# Altium PCB tiny200.PcbDoc
Units mil, origin at the board's own origin, x right, y up, seen from the top; angles counter-clockwise.
Board outline 2000 x 900 mil, 4 copper layers (Top Layer, GND, MidLayer1, Bottom Layer), stack 28.8 mil thick; 116 components, 103 nets, 483 pads, 188 vias.
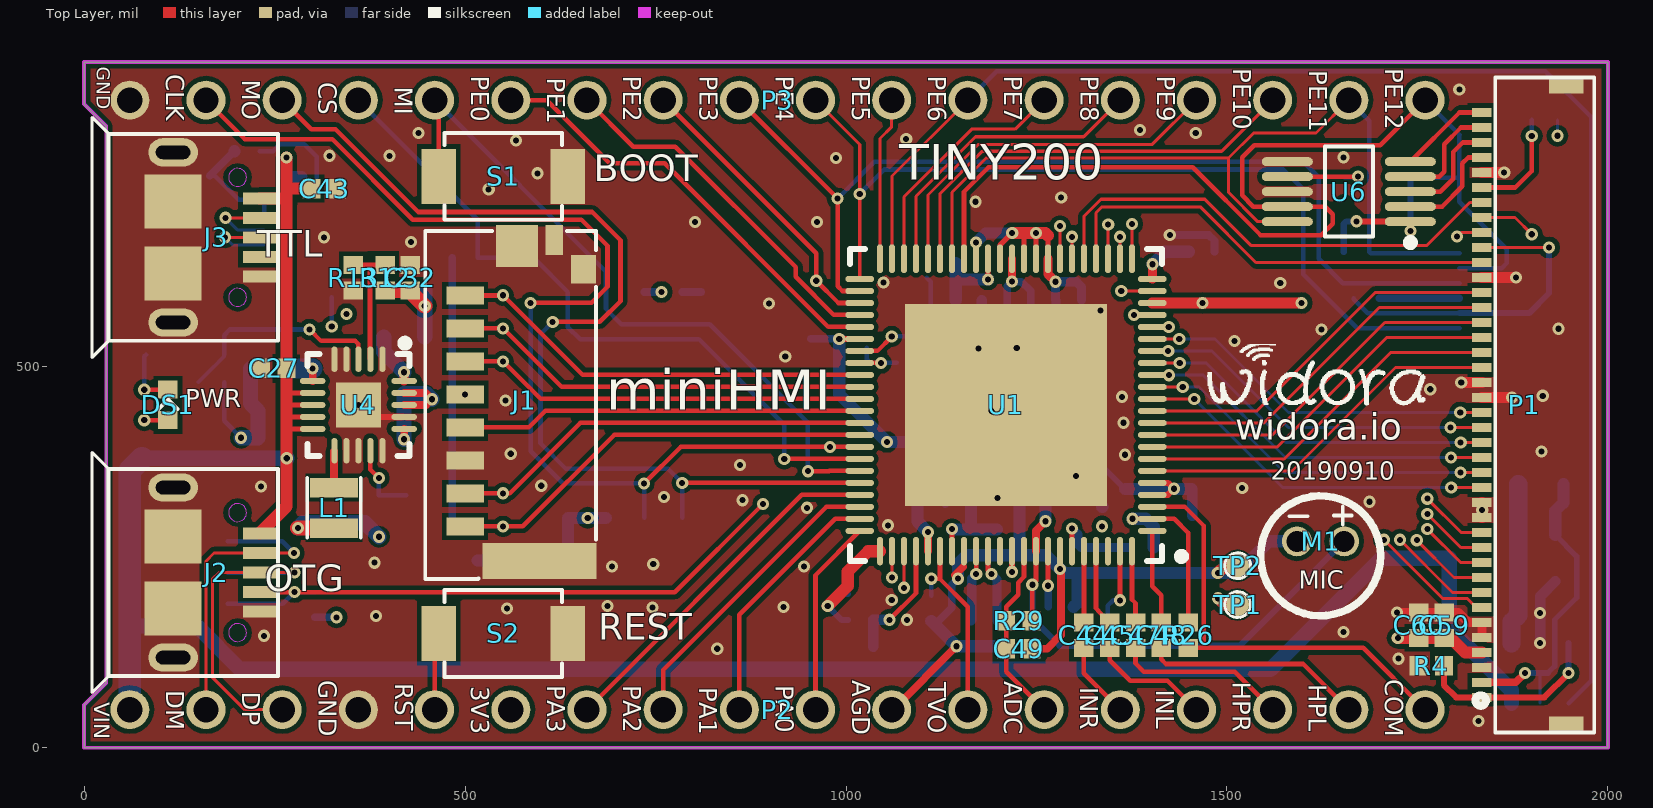
[diagram p0: Top Layer view]
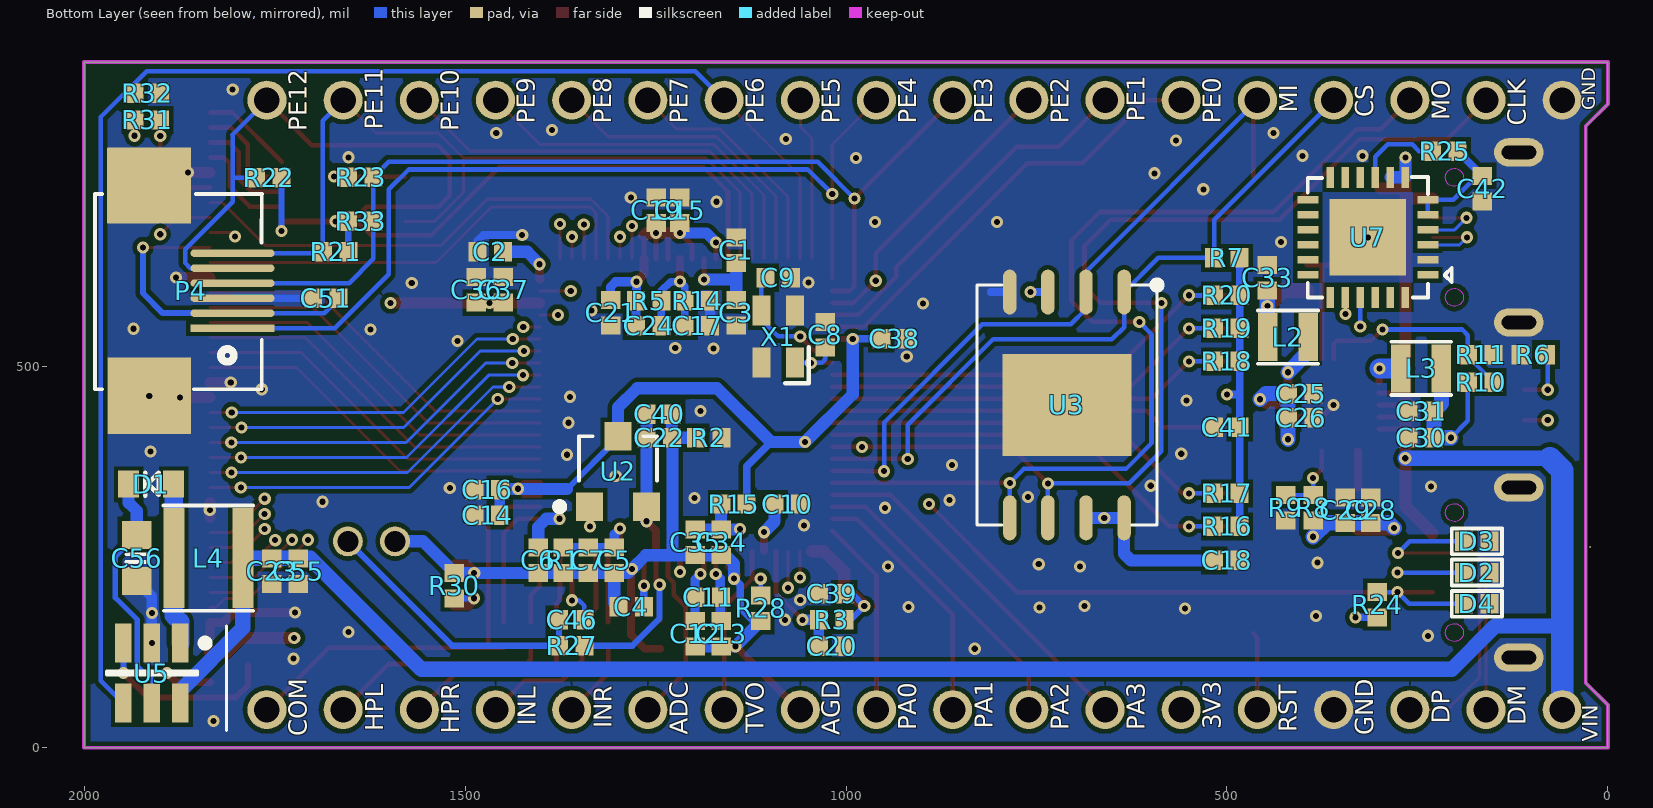
[diagram p1: Bottom Layer view, seen from below]
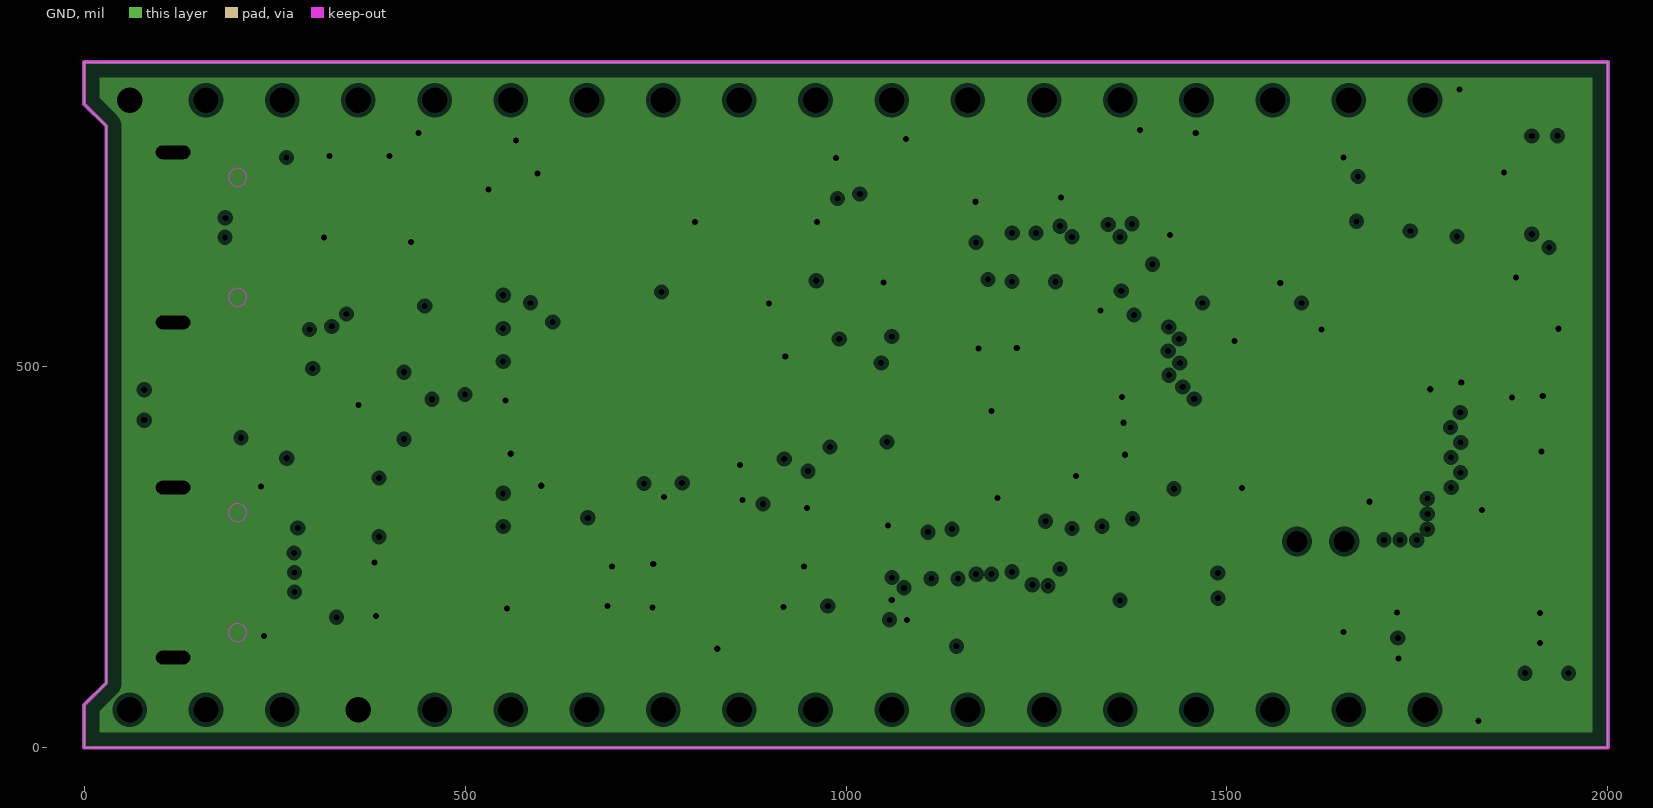
[diagram p2: GND, clearances drawn from the general rule]
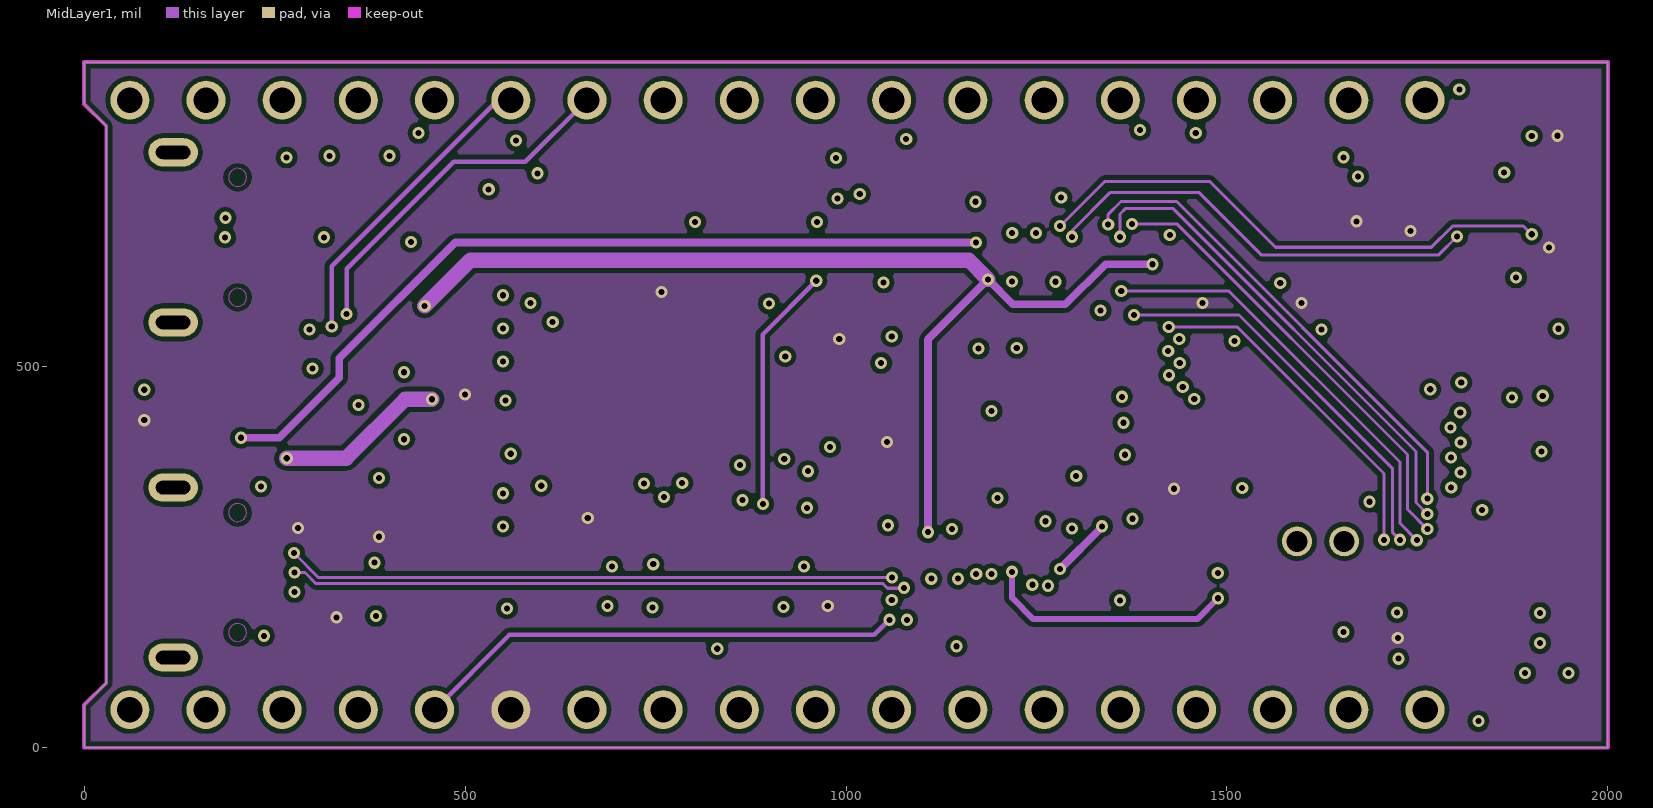
[diagram p3: MidLayer1]
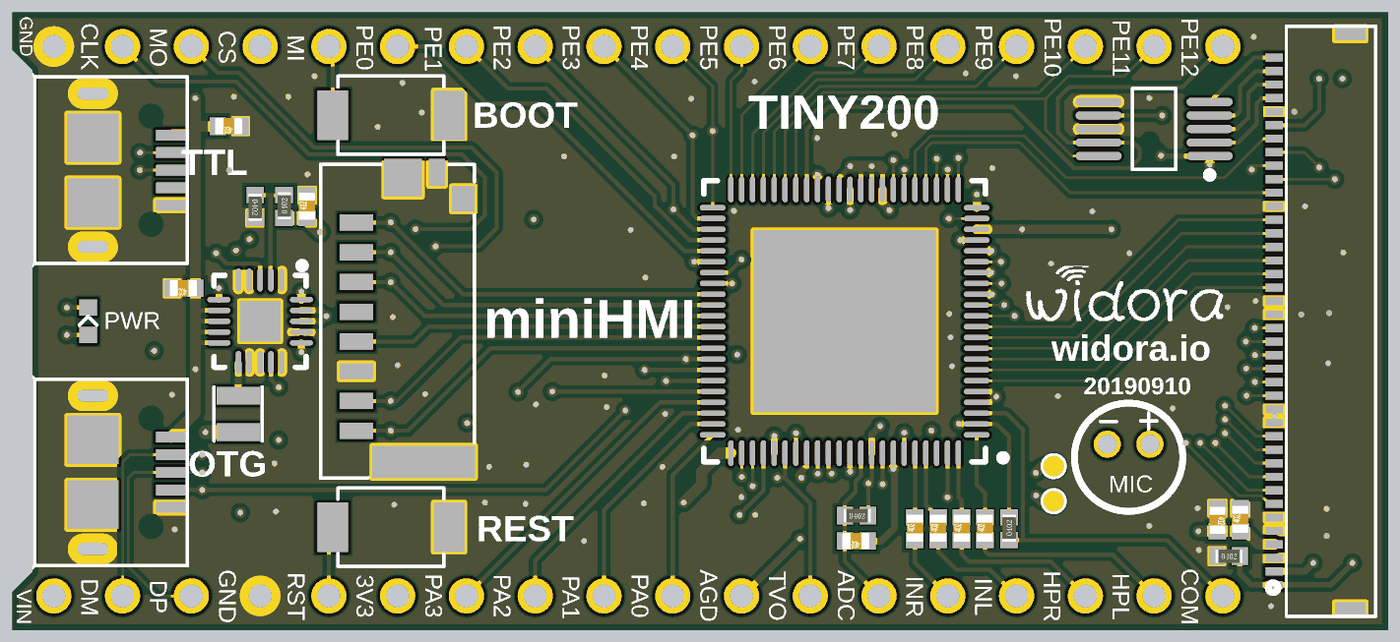
[diagram p4: 3D render of the assembled board from above, using the file's embedded part models]
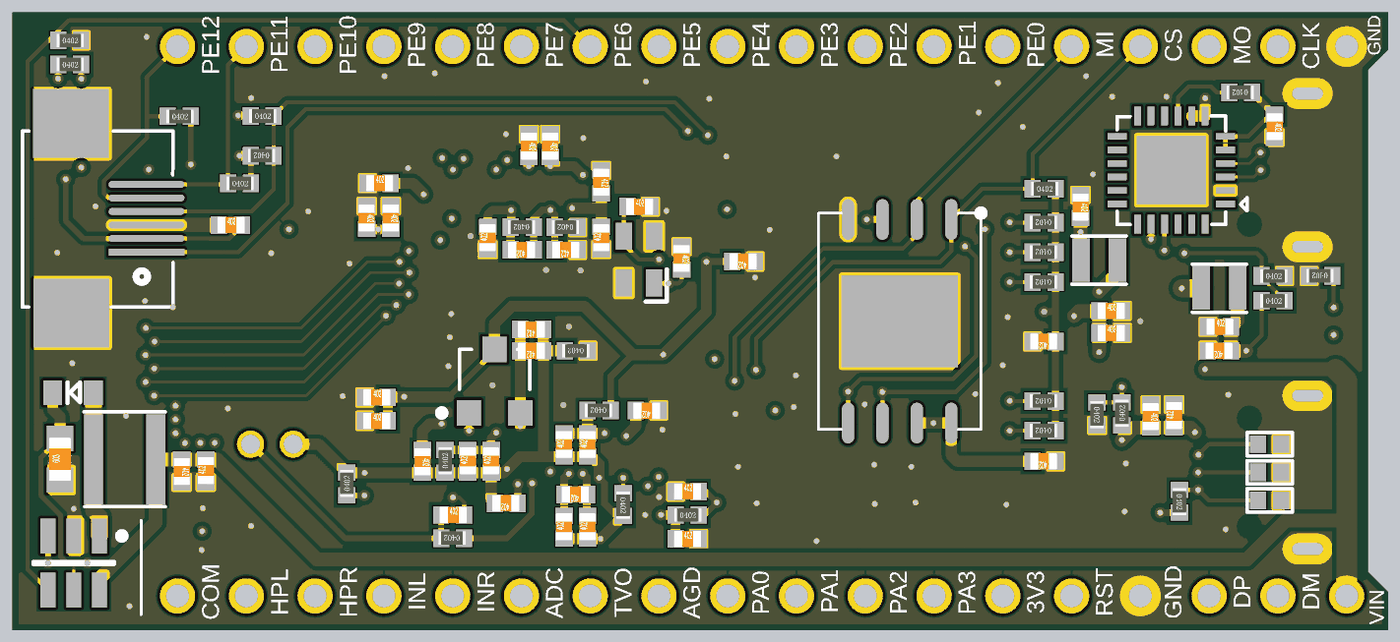
[diagram p5: 3D render of the assembled board from below, using the file's embedded part models]

## Layer stack, top to bottom
Top Solder: solder mask 0.4, Solder Resist, Dk 3.5
Top Layer: signal copper 1.4
Dielectric1: core 7.6, FR-4, Dk 4.8
GND: plane copper 1.4, net GND
Dielectric3: prepreg 8, FR-4, Dk 4.8
MidLayer1: signal copper 1.4
Dielectric2: core 7.6, FR-4, Dk 4.8
Bottom Layer: signal copper 1.4
Bottom Solder: solder mask 0.4, Solder Resist, Dk 3.5

## Board outline
29,816 0,845 0,900 2000,900 2000,0 0,0 0,56 29,85

## Design rules (kind name [scope] priority, off if disabled: settings)
Clearance Clearance_Polygon [InPolygon] p1: gap=6
Clearance [All] p2: gap=4
ComponentClearance [All] p1 off: gap=1 collisioncheckmode=3 verticalgap=1 showdistances=FALSE
DiffPairsRouting [All] p1: maxlimit=20 minlimit=4 mostfreqgap=5 toplayer_minwidth=4 toplayer_maxwidth=4 toplayer_prefwidth=4 midlayer1_minwidth=4 midlayer1_maxwidth=4 midlayer1_prefwidth=4 bottomlayer_minwidth=4 bottomlayer_maxwidth=4 bottomlayer_prefwidth=4 maxuncoupledlength=3000
FabricationTestPointUsage TestPointUsage [All] p1 off: valid=0 allowmultiple=FALSE
FabricationTestpoint Testpoint [(IsPad And (OnTopLayer Or OnBottomLayer))] p1 off: side=3 testpointundercomponent=TRUE minsize=40 maxsize=100 preferedsize=60 minholesize=0 maxholesize=40 preferedholesize=32 testpointgrid=1 allowsidetop=TRUE allowsidebottom=TRUE usegrid=TRUE gridtolerance=0.01
Height [All] p1 off: minheight=0 maxheight=1000 prefheight=500
HoleSize [All] p1: absolutevalues=TRUE maxlimit=150 minlimit=1 maxpercent=80.000 minpercent=20.000
MinimumSolderMaskSliver [All] p1 off: minsoldermaskwidth=1
PlaneClearance [All] p1: clearance=6
PlaneConnect [All] p1: planeconnectstyle=Direct reliefexpansion=20 reliefentries=4 reliefconductorwidth=25 reliefairgap=10
PolygonConnect PolygonConnect_isvia [All vs IsVia] p1: connectstyle=Direct reliefconductorwidth=10 reliefentries=4 polygonreliefangle="90 Angle" airgapwidth=10
PolygonConnect [All] p2: connectstyle=Direct reliefconductorwidth=8 reliefentries=4 polygonreliefangle="90 Angle" airgapwidth=10
RoutingVias [All] p1: holewidth=8 width=16 viastyle="Through Hole" minholewidth=8 minwidth=16 maxholewidth=100 maxwidth=100
ShortCircuit [InNet('WIFI') vs InNet('GND')] p1 off: allowed=FALSE
SilkToSilkClearance [All] p1: silktosilkclearance=0
SilkToSolderMaskClearance SilkscreenOverComponentPads [IsPad] p1: minsilkscreentomaskgap=0 clearancetoexposedcopper=TRUE
SolderMaskExpansion [All] p1: expansion=4
Width [All] p1: maxlimit=100 minlimit=4 preferedwidth=5
18 further rules are at their usual default settings.

## Classes and differential pairs
differential pair U: +U_P -U_N

## Components (designator, comment, footprint, x,y, rotation, side; value= is the part's Value field where it differs from the comment)
C1 "10uF" C0402 1144,653 r270 bottom
C2 "0.1uF" C0402 1467,651 r180 bottom
C3 "0.1uF" C0402 1144,571 r90 bottom
C4 "1uF" C0402 1282,185 r0 bottom
C5 "4.7uF" C0402 1304.11,246 r90 bottom
C6 "1uF" C0402 1404,246 r270 bottom
C7 "0.1uF" C0402 1338,246 r90 bottom
C8 "10pF" C0402 1027,542 r270 bottom
C9 "10pF" C0402 1089,617 r180 bottom
C10 "0.1uF" C0402 1077,320 r0 bottom
C11 "10uF" C0402 1181.11,197.7 r0 bottom
C12 "4.7uF" C0402 1198,150 r90 bottom
C13 "4.7uF" C0402 1164,150 r90 bottom
C14 "10uF" C0402 1471,305 r180 bottom
C15 "1uF" C0402 1218.11,705.7 r270 bottom
C16 "0.1uF" C0402 1471,339 r180 bottom
C17 "0.1uF" C0402 1195,554 r0 bottom
C18 "0.1uF" C0402 500,246 r0 bottom
C19 "10uF" C0402 1249.11,705.7 r270 bottom
C20 "1uF" C0402 1019,133 r180 bottom
C21 "0.1uF" C0402 1309,571 r90 bottom
C22 "4.7uF" C0402 1245,407 r0 bottom
C23 "10uF" C0402 1754,232 r270 bottom
C24 "0.1uF" C0402 1259,554 r0 bottom
C25 "10uF" C0402 403,465 r180 bottom
C26 "10uF" C0402 403,433 r180 bottom
C27 "10uF" C0402 249,498 r180 top
C28 "10uF" C0402 311,312 r90 bottom
C29 "0.1uF" C0402 345,312 r270 bottom
C30 "10uF" C0402 245,407 r0 bottom
C31 "0.1uF" C0402 245,442 r180 bottom
C32 "10uF" C0402 428,617 r90 top
C33 "0.1uF" C0402 447,617 r270 bottom
C34 "10uF" C0402 1164,270 r90 bottom
C35 "0.1uF" C0402 1198,270 r90 bottom
C36 "10uF" C0402 1485,601 r270 bottom
C37 "0.1uF" C0402 1450,601 r270 bottom
C38 "0.1uF" C0402 937,537 r0 bottom
C39 "0.1uF" C0402 1019,202 r180 bottom
C40 "0.1uF" C0402 1245,438 r0 bottom
C41 "104" C0402 499.96,420.48 r0 bottom
C42 "10uF" C0402 165,734 r270 bottom
C43 "10uF" C0402 315,734 r180 top
C44 "1uF" C0402 1312,148 r90 top
C45 "1uF" C0402 1346,148 r90 top
C46 "1uF" C0402 1360,168 r180 bottom
C47 "10uF" C0402 1380,148 r90 top
C48 "10uF" C0402 1414,148 r90 top
C49 "1nF" C0402 1227,130 r180 top
C51 "104" C0402 1683,590 r180 bottom
C55 "10uF" C0402 1719,232 r90 bottom
C56 "10uF/25V" C0603 1931,249 r90 bottom
C59 "104" C0402 1785.27,161 r90 top
C60 "10uF" C0402 1752,161 r270 top
D1 "B5819WT" SOD523 1912,346 r0 bottom
D2 "Diode_tvs" 0402TVS 172,230 r180 bottom
D3 "Diode_tvs" 0402TVS 172,271 r0 bottom
D4 "Diode_tvs" 0402TVS 172,189 r0 bottom
DS1 "GREEN" LED0402 110,450 r90 top
J1 "TF" TFCARD473092651 560,450 r270 top locked
J2 "MICRO_USB" MICROUSB 160,230 r270 top locked
J3 "MICRO_USB" MICROUSB 160,670 r270 top locked
L1 "2.2uH" VLS2016 328,315 r90 top
L2 "2.2uH" VLS2016 420,539 r180 bottom
L3 "2.2uH" VLS2016 245,498 r0 bottom
L4 "2.2uH" VLS3012E 1837,248.5 r180 bottom
M1 "MIC" MIC 1622.91,252 r0 top
P1 "FFC40-RGBLCD" FFC/SM0.5-1H40 1890,450 r90 top locked
P2 "Header 18" HDR1X18-M2 60,50 r0 top locked
P3 "Header 18" HDR1X18-M2 60,850 r0 top locked
P4 "FPC6" FPC6 1860,600 r90 bottom locked
R1 "200K" R0402 1371,246 r90 bottom
R2 "0R" R0402 1180,407 r0 bottom
R3 "10K" R0402 1019,168 r180 bottom
R4 "4R3" R0402 1768,108 r0 top
R5 "2K/1%" R0402 1259,587 r0 bottom
R6 "5.1K" R0402 98,516 r0 bottom
R7 "10K" R0402 499.96,643 r180 bottom
R8 "680K 1%" R0402 387,315 r90 bottom
R9 "150K 1%" R0402 423,315 r270 bottom
R10 "470K 1%" R0402 167,480 r180 bottom
R11 "150K 1%" R0402 167,516 r180 bottom
R12 "150K 1%" R0402 395,617 r90 top
R13 "150K 1%" R0402 353,617 r270 top
R14 "2K/1%" R0402 1195,587 r0 bottom
R15 "0R" R0402 1147,320 r0 bottom
R16 "10K" R0402 499.96,290.56 r0 bottom
R17 "10K" R0402 499.96,333.86 r0 bottom
R18 "10K" R0402 499.96,507.09 r0 bottom
R19 "10K" R0402 499.96,550.4 r0 bottom
R20 "10K" R0402 499.96,593.7 r0 bottom
R21 "10K" R0402 1670,651 r180 bottom
R22 "10K" R0402 1757.44,748.44 r180 bottom
R23 "NC" R0402 1637,749 r180 bottom
R24 "10K" R0402 303,188 r270 bottom
R25 "5.1K" R0402 214,783 r0 bottom
R26 "22R" R0402 1449,148 r90 top
R27 "1K" R0402 1360,134 r0 bottom
R28 "75R" R0402 1112,183 r270 bottom
R29 "100K" R0402 1227,167 r0 top
R30 "75R" R0402 1514,213 r90 bottom
R31 "10K" R0402 1917,824 r180 bottom
R32 "10K" R0402 1917,859 r180 bottom
R33 "10K" R0402 1637,691 r0 bottom
S1 "SW-BUTTON" MINIBUTTON 550,750 r0 top
S2 "SW-BUTTON" MINIBUTTON 550,150 r0 top
TP1 "TEST POINT" TEST-POINT 1514,188 r90 top
TP2 "TEST POINT" TEST-POINT 1514,239 r90 top
U1 "F1C200s" QFN40P1000X1000X85_HS-89N 1210,450 r180 top locked
U2 "XC6206-3.0" SOT23 1299.11,362.7 r180 bottom locked
U3 "SPIFLASH_SOP8W" WSON-SPIFLASH 710,450 r270 bottom locked
U4 "EA3036" QFN40P300X300X80_HS-21N 360,450 r270 top locked
U5 "SY7201" SOT23-6 1911,98 r270 bottom locked
U6 "NS2009" TSSOP10 1660,730 r180 top locked
U7 "CP2104" QFN24 315,670 r0 bottom locked
X1 "XTAL2520-24M" XTAL2520 1089.11,539.7 r270 bottom locked

## Footprints (in the part's own frame and the unit in brackets; to place one, negate y for a bottom-side part, rotate by r counter-clockwise, add the part's x,y. Pads: shape width x height; smd on the part's side, far side on the other; paste and mask are expansions set on the pad)
0402TVS [mm]
  rect 0.6x0.65 smd mask+0.051: 1(-0.425,0) 2(0.425,0)
  silkscreen extent -0.84,-0.43 0.84,0.43
C0402 [mm]
  rect 0.6x0.65 smd mask+0.051: 1(-0.425,0) 2(0.425,0)
  body extent -0.48,-0.3 0.52,0.3, height 0.2
C0603 [mm]
  rect 0.93x0.98 smd: 1(-0.77,0) 2(0.77,0)
  silkscreen extent -0.13,-0.35 0.13,0.35, body extent -0.8,-0.4 0.8,0.4, height 0.3
FFC/SM0.5-1H40 [mm] "Connector; FH12 Series; 40 Position; 0.5mm Spaced Bottom Contact"
  rect 0.3x0.65 smd: 1(-9.75,1.405) 2(-9.25,1.405) 3(-8.75,1.405) 4(-8.25,1.405) 5(-7.75,1.405) 6(-7.25,1.405) 7(-6.75,1.405) 8(-6.25,1.405) 9(-5.75,1.405) 10(-5.25,1.405) 11(-4.75,1.405) 12(-4.25,1.405) 13(-3.75,1.405) 14(-3.25,1.405) 15(-2.75,1.405) 16(-2.25,1.405) 17(-1.75,1.405) 18(-1.25,1.405) 19(-0.75,1.405) 20(-0.25,1.405) 21(0.25,1.405) 22(0.75,1.405) 23(1.25,1.405) 24(1.75,1.405) 25(2.25,1.405) 26(2.75,1.405) 27(3.25,1.405) 28(3.75,1.405) 29(4.25,1.405) 30(4.75,1.405) 31(5.25,1.405) 32(5.75,1.405) 33(6.25,1.405) 34(6.75,1.405) 35(7.25,1.405) 36(7.75,1.405) 37(8.25,1.405) 38(8.75,1.405) 39(9.25,1.405) 40(9.75,1.405)
  rect 0.5x1.15 smd: G(-10.635,-1.405) G(10.635,-1.405)
  silkscreen extent -10.91,-2.34 10.92,0.96
FPC6 [mm]
  rect 2.54x2.8 smd: 0(-3.505,1.384) 0(3.505,1.392)
  rect 0.25x2.8 smd: 1(-1.25,-1.392)
  oval 0.25x2.8 smd: 2(-0.75,-1.392) 3(-0.25,-1.392) 4(0.25,-1.392) 5(0.75,-1.392) 6(1.25,-1.392)
  silkscreen extent -3.29,-2.38 3.22,3.19
HDR1X18-M2 [mm]
  round 1.3 hole 0.85: 1(0,0) 2(2.54,0) 3(5.08,0) 4(7.62,0) 5(10.16,0) 6(12.7,0) 7(15.24,0) 8(17.78,0) 9(20.32,0) 10(22.86,0) 11(25.4,0) 12(27.94,0) 13(30.48,0) 14(33.02,0) 15(35.56,0) 16(38.1,0) 17(40.64,0) 18(43.18,0)
LED0402 [mm]
  rect 0.6x0.65 smd: A(-0.508,0) K(0.508,0)
  silkscreen extent -0.15,-0.32 0.18,0.33
MIC [mm]
  round 1 hole 0.7: 1(0.787,0.483) 2(-0.787,0.483)
  silkscreen extent -2,-2 2,2
MICROUSB [mm] "MICROUSB"
  rect 0.4x1.1 smd: 1(-1.3,1.78) 2(-0.65,1.78) 3(0,1.78) 4(0.65,1.78) 5(1.3,1.78)
  oval 0.94x1.65 hole 0.45 slot 1.15 at 90 deg: 6(-2.835,-1.096) 7(2.835,-1.096)
  rect 1.8x1.9 smd: 8(-1.2,-1.096) 9(1.2,-1.096)
  Keep-Out Layer circle w0.025: c2,1.054 r0.3
  Keep-Out Layer circle w0.025: c-2,1.054 r0.3
  silkscreen extent -4,-3.8 4,2.4
MINIBUTTON [mil] "MINIBUTTON"
  rect 44.88x72.05 smd: 1(-84.42,0.08) 2(84.88,0.08)
  silkscreen extent -77,-57 77,57
QFN24 [mm]
  rect 0.7x0.25 smd: 1(-2,1.25) 2(-2,0.75) 3(-2,0.25) 4(-2,-0.25) 5(-2,-0.75) 6(-2,-1.25) 13(2,-1.25) 14(2,-0.75) 15(2,-0.25) 16(2,0.25) 17(2,0.75) 18(2,1.25)
  rect 0.25x0.7 smd: 7(-1.25,-2) 8(-0.75,-2) 9(-0.25,-2) 10(0.25,-2) 11(0.75,-2) 12(1.25,-2) 19(1.25,2) 20(0.75,2) 21(0.25,2) 22(-0.25,2) 23(-0.75,2) 24(-1.25,2)
  rect 2.55x2.55 smd: 25(0,0)
  silkscreen extent -2.79,-2.01 2.01,2.01
QFN40P300X300X80_HS-21N [mm] "QFN, 20-Leads, Body 3.00x3.00mm, Pitch 0.40mm, Thermal Pad 1.65x1.65mm, IPC Medium Density"
  oval 0.85x0.2 smd: 1(-1.525,0.8) 2(-1.525,0.4) 3(-1.525,0) 4(-1.525,-0.4) 5(-1.525,-0.8) 11(1.525,-0.8) 12(1.525,-0.4) 13(1.525,0) 14(1.525,0.4) 15(1.525,0.8)
  oval 0.2x0.85 smd: 6(-0.8,-1.525) 7(-0.4,-1.525) 8(0,-1.525) 9(0.4,-1.525) 10(0.8,-1.525) 16(0.8,1.525) 17(0.4,1.525) 18(0,1.525) 19(-0.4,1.525) 20(-0.8,1.525)
  rect 1.5x1.5 smd: 21(0,0)
  silkscreen extent -2.18,-1.7 1.7,1.7, body extent -1.55,-1.55 1.55,1.55, height 0.8
QFN40P1000X1000X85_HS-89N [mm] "QFN, 88-Leads, Body 10.00x10.00mm, Pitch 0.40mm, Thermal Pad 6.74x6.74mm, IPC Medium Density"
  oval 0.95x0.2 smd: 1(-4.875,4.2) 2(-4.875,3.8) 3(-4.875,3.4) 4(-4.875,3) 5(-4.875,2.6) 6(-4.875,2.2) 7(-4.875,1.8) 8(-4.875,1.4) 9(-4.875,1) 10(-4.875,0.6) 11(-4.875,0.2) 12(-4.875,-0.2) 13(-4.875,-0.6) 14(-4.875,-1) 15(-4.875,-1.4) 16(-4.875,-1.8) 17(-4.875,-2.2) 18(-4.875,-2.6) 19(-4.875,-3) 20(-4.875,-3.4) 21(-4.875,-3.8) 22(-4.875,-4.2) 45(4.875,-4.2) 46(4.875,-3.8) 47(4.875,-3.4) 48(4.875,-3) 49(4.875,-2.6) 50(4.875,-2.2) 51(4.875,-1.8) 52(4.875,-1.4) 53(4.875,-1) 54(4.875,-0.6) 55(4.875,-0.2) 56(4.875,0.2) 57(4.875,0.6) 58(4.875,1) 59(4.875,1.4) 60(4.875,1.8) 61(4.875,2.2) 62(4.875,2.6) 63(4.875,3) 64(4.875,3.4) 65(4.875,3.8) 66(4.875,4.2)
  oval 0.2x0.95 smd: 23(-4.2,-4.875) 24(-3.8,-4.875) 25(-3.4,-4.875) 26(-3,-4.875) 27(-2.6,-4.875) 28(-2.2,-4.875) 29(-1.8,-4.875) 30(-1.4,-4.875) 31(-1,-4.875) 32(-0.6,-4.875) 33(-0.2,-4.875) 34(0.2,-4.875) 35(0.6,-4.875) 36(1,-4.875) 37(1.4,-4.875) 38(1.8,-4.875) 39(2.2,-4.875) 40(2.6,-4.875) 41(3,-4.875) 42(3.4,-4.875) 43(3.8,-4.875) 44(4.2,-4.875) 67(4.2,4.875) 68(3.8,4.875) 69(3.4,4.875) 70(3,4.875) 71(2.6,4.875) 72(2.2,4.875) 73(1.8,4.875) 74(1.4,4.875) 75(1,4.875) 76(0.6,4.875) 77(0.2,4.875) 78(-0.2,4.875) 79(-0.6,4.875) 80(-1,4.875) 81(-1.4,4.875) 82(-1.8,4.875) 83(-2.2,4.875) 84(-2.6,4.875) 85(-3,4.875) 86(-3.4,4.875) 87(-3.8,4.875) 88(-4.2,4.875)
  rect 6.74x6.74 smd: 89(0,0)
  silkscreen extent -5.97,-5.2 5.2,5.2, body extent -5.05,-5.05 5.05,5.05, height 0.85
R0402 [mm]
  rect 0.6x0.65 smd mask+0.051: 1(-0.425,0) 2(0.425,0)
  body extent -0.47,-0.25 0.53,0.25, height 0.35
SOD523 [mm]
  rect 0.7x0.9 smd: A(-0.75,0) K(0.75,0)
  silkscreen extent -0.25,-0.38 0.2,0.38
SOT23 [mm] "SOT-23; 3 Leads; Body 3.0 x 2.5 mm, inc. leads (LxW max)"
  rect 0.9x0.95 smd: 1(-0.95,-1.175) 2(0.95,-1.175) 3(0,1.175)
  silkscreen extent -2.07,-1.3 1.3,1.18
SOT23-6 [mm] "SOT23, 5-Leads, Body 3.0x2.6mm (max), Pitch 0.95mm, IPC Medium Density"
  rect 1.3x0.55 smd: 1(-1,0.95) 2(-1,0) 3(-1,-0.95) 4(1,-0.95) 5(1,0) 6(1,0.95)
  silkscreen extent -1.12,-1.5 0.05,1.9, body extent -0.7,-1.5 0.7,1.5, height 1.1
TEST-POINT [mil]
  round 30 smd paste-15.75: 1(0,0)
  silkscreen extent -17,-17 17,17
TFCARD473092651 [mm] "TFCARD473092651"
  rect 0.6x1.25 smd: 1(-3.65,-1.525) 2(-2.55,-1.525) 3(-1.45,-1.525) 4(-0.35,-1.525) 5(0.75,-1.525) 6(1.85,-1.525) 7(2.95,-1.525) 8(4.05,-1.525)
  rect 1.2x3.8 smd: G1(5.2,0.96)
  rect 1.4x1.4 smd: G2(-5.3,0.2)
  rect 1x0.6 smd: G3(-5.5,1.45)
  rect 0.95x0.85 smd: G4(-4.525,2.425)
  silkscreen extent -5.8,-2.85 5.8,2.84
TSSOP10 [mm] "TSSOP, 10-Leads, Body 3.0x3.0mm (max), Pitch 0.50mm, IPC Medium Density"
  oval 1.7x0.3 smd: 1(-2.05,1) 2(-2.05,0.5) 3(-2.05,0) 4(-2.05,-0.5) 5(-2.05,-1) 6(2.05,-1) 7(2.05,-0.5) 8(2.05,0) 9(2.05,0.5) 10(2.05,1)
  silkscreen extent -2.18,-1.5 0.8,1.82, body extent -1.5,-1.5 1.5,1.5, height 1.1
VLS2016 [mm] "VLS2016"
  rect 0.65x1.6 smd: 1(0.675,0) 2(-0.675,0)
  silkscreen extent -1,-0.89 1,0.89
VLS3012E [mil] "VLS3012E"
  rect 27.56x131.1 smd: 1(45.28,0.5) 2(-45.28,0.5)
  silkscreen extent -59,-69 59,70
WSON-SPIFLASH [mm]
  oval 1.5x0.45 smd: 1(-3.764,1.905) 2(-3.764,0.635) 3(-3.764,-0.635) 4(-3.764,-1.905) 5(3.764,-1.905) 6(3.764,-0.635) 7(3.764,0.635) 8(3.764,1.905)
  rect 3.4x4.3 smd: 4(0,0)
  silkscreen extent -4.12,-3 4,3.12
XTAL2520 [mil] "XTAL2520"
  rect 39.37x23.62 smd: 1(34,22) 2(-34,22) 3(-34,-22) 4(34,-22)
  silkscreen extent 14,9 61,40

## Part data
C1 C2 C3 C4 C5 C6 C7 C8 C9 C10 C11 C12 C13 C14 C15 C16 C17 C18 C19 C20 C21 C22 C23 C24 C25 C26 C27 C28 C29 C30 C31 C32 C33 C34 C35 C36 C37 C38 C39 C40 C41 C42 C43 C44 C45 C46 C47 C48 C49 C51 C55 C56 C59 C60: library part CAP, "普通小电容"
D1: library part Diode, "普通二极管"
D2 D3 D4: "tvs"
DS1: library part LED
J1: library part TF_473092651
L1 L2 L3 L4: library part L, "普通电感"
P2 P3: "Header, 18-Pin"
R1 R2 R3 R4 R5 R7 R8 R9 R10 R11 R12 R13 R14 R15 R16 R17 R18 R19 R20 R21 R22 R23 R24 R25 R26 R27 R28 R29 R30 R31 R32 R33: library part RES, "普通电阻"
R6: library part RES, "普通电阻1%精度"
TP1 TP2: library part TP, "Description"
U2: library part XC6206
U5: library part PT4101
X1: library part XTAL3225

## Via types
v1: diameter 16, hole 8, Top Layer to Bottom Layer, tented both sides, 188 vias

## Nets (pads, with @x,y where several pads share a name; then routed paths per layer and width w, separated by ;. In a path a pad name is that pad's centre, name@x,y a point inside that pad or via, vN(x,y) a via of type N, cw(c..) or ccw(c..) an arc to the next point about the centre after c; other vN are vias at no path point)
AGND: C4.2 C5.1 C6.2 C7.1 C12.1 C13.1 C22.1 C34.1 C35.1 C40.1 C49.1 M1.2 P2.11 R1.1 R2.2 R28.2 R30.2 TP2.1 U1.74 U1.82 U2.1 | length 1317.8
  Top Layer w10: P2.11 1061.73,50 v1(1145,133.27) ; v1@1142.7,226.3 1153.88,237.47 ; C49.1 1264,130 1282.12,148.12 1282.12,233.45 v1(1280.87,234.7)
  Top Layer w16: v1(1488,229.27) 1497.73,239 TP2.1
  MidLayer1 w10: v1(1280.87,234.7) 1336.11,289.94 v1(1336.11,290.7)
  Bottom Layer w10: P2.11@1056,54 P2.11 ; R28.2 1121.27,166.27 1139,184 1139,214 v1(1147,222)
  Bottom Layer w16: R28.2 v1(1145,133.27) C13.1 C12.1 ; v1(1147,222) 1147,241.59 1158.11,252.7 1227.84,252.7 ; R2.2 C22.1 C40.1 ; C22.1@1227.84,406.57 1227.84,252.7 ; C4.2 1304.11,190.38 C5.1 ; U2.1@1336.11,316.04 U2.1 ; M1.2 1555.27,271 R30.2 1513.54,229.27 v1(1488,229.27) C6.2 R1.1 C7.1 C5.1 ; 1227.84,252.7 1262.87,252.7 v1(1280.87,234.7) 1286.3,229.27 C5.1
AVCC: C22.2 C40.2 R27.1 R29.2 U1.80 U2.2 | length 436.2
  Top Layer w6: R29.2 1244.56,167.83 v1(1244.56,214) 1249.37,218.81 U1.80
  Top Layer w10: U1.80 1249.37,284.96 v1(1261.71,297.3)
  Bottom Layer w8: v1(1244.56,214) 1244.56,169.79 1280.35,134 R27.1
  Bottom Layer w16: v1(1261.71,297.3) U2.2 C22.2 ; C22.2 C40.2
FMINL: C44.2 U1.84 | length 93.4
  Top Layer w6: U1.84@1312.04,257.75 U1.84 C44.2@1312.36,165.09
FMINR: C45.2 U1.85 | length 100.7
  Top Layer w6: U1.85 1328.11,183.13 1331.8,179.44 1331.8,178.94 C45.2
GND: C1.1 C2.1 C3.1 C8.1 C9.2 C10.1 C14.1 C15.1 C16.1 C17.1 C18.1 C19.1 C20.2 C21.1 C23.2 C25.2 C26.2 C27.2 C28.2 C29.1 C30.2 C31.1 C32.2 C33.1 C36.1 C37.1 C38.1 C39.1 C41.2 C42.2 C43.1 C51.1 C55.1 C56.1 C59.2 C60.1 D2.2 D3.1 D4.1 J1.6 J1.G1 J1.G2 J1.G3 J1.G4 J2.5 J2.6 J2.7 J2.8 J2.9 J3.5 J3.6 J3.7 J3.8 J3.9 P1.3 P1.5 P1.6 P1.13 P1.14 P1.21 P1.22 P1.29 P1.36 P1.G P2.4 P3.1 P4.0 P4.3 R2.1 R4.1 R6.2 R9.2 R11.2 R13.2 R14.1 R32.2 S1.2 S2.2 U1.89 U3.4 U4.1 U4.4 U4.5 U4.12 U4.13 U4.15 U4.17 U4.21 U5.2 U6.6 U6.8 U7.2 U7.25 X1.2 X1.4 | length 692.1
  Top Layer w8: v1(360,450) 375.75,434.25 U4.17
  Top Layer w12: v1(1723.27,177.73) C60.1 C59.2 1803.27,177.73 1816.43,164.57 P1.6 P1.5
  Top Layer w14: v1(1807.47,479.53) P1.22 ; P1.13 P1.14 ; P1.21 v1(1874,459.84) ; P1.29 v1(1879.32,617.32) ; P1.36 v1(1863.88,755.12)
  Bottom Layer w10: U3.4@785,598.19 809.81,598.19 ; v1(1425,673) 1476,673 1483.73,665.27 C2.1 ; C51.1 P4.3@1805.05,590
  Bottom Layer w14: C17.1 R14.1 ; v1(1911,137.37) 1911,198.68 C56.1
  other v1: 1830,35 1725,117 831,130 236,147 1653,152 1080,168 383,173 1911,177 555,183 746,184 918,185 687,186 1060,194 693,238 945,238 747,241 381,243 1055,292 1835,312 949,315 1687,323 864,325 1199,328 761,329 1520,341 232,343 600,344 1302.11,356.7 861,371 1366.11,384.7 560,386 1913,389 1364.11,426.7 1191,442 553,456 1362.11,460.7 1914.48,462.01 1766.8,470.59 920.27,513.73 1174,524 1224.11,524.7 1510,534 1624,549 1935,550 1334,574 899,583 1049.11,610.7 1570,610 429,664 315,670 802,690 962,690 1170.11,716.7 1282.43,722.43 531,733 595,754 987,774 1653,775 322,777 401,777 567,797 1079,799 439,807 1459,807 1386,811 1805,864
HPCOM: P2.18 R26.1 U1.3 | length 582.6
  Top Layer w6: U1.3 1444.86,316.14 1469.27,291.73 1469.27,131.27 ; R26.1 1469.27,131.27 ; P2.18 1678.73,131.27 1469.27,131.27
HPCOMFB: C6.1 R26.2 U1.2 | length 257.5
  Top Layer w6: v1(1376.11,300.7) 1376.42,300.39 U1.2 1430.61,300.39 1449,282 R26.2
  Bottom Layer w16: v1(1376.11,300.7) 1393.3,300.7 1404,290 C6.1
HPL: C48.2 U1.1 | length 124.9
  Top Layer w6: U1.1 1401.93,212.07 1414,200 C48.2
HPR: C47.2 U1.88 | length 95.3
  Top Layer w6: U1.88 1375.35,194.65 1380,190 C47.2
LCD_CLK: P1.30 U1.26 | length 600.3
  Top Layer w4: U1.26 1328.11,702.11 1336,710 1465,710 1537.99,637.01 P1.30
LCD_D2: P1.23 U1.6 | length 489
  Top Layer w4: U1.6 1585.39,363.39 1721.21,499.21 P1.23
LCD_D3: P1.24 U1.7 | length 490.6
  Top Layer w4: U1.7 1575.13,379.13 1714.9,518.9 P1.24
LCD_D4: P1.25 U1.8 | length 492.3
  Top Layer w4: U1.8 1565.88,394.88 1709.58,538.58 P1.25
LCD_D5: P1.26 U1.9 | length 493.9
  Top Layer w4: U1.9 1559.63,410.63 1707.27,558.27 P1.26
LCD_D6: P1.27 U1.10 | length 495.5
  Top Layer w4: U1.10 1548.38,426.38 1699.95,577.95 P1.27
LCD_D7: P1.28 U1.11 | length 497.2
  Top Layer w4: U1.11 1539.13,442.13 1694.64,597.64 P1.28
LCD_D10: P1.15 U1.12 | length 480.9
  Top Layer w4: U1.12 v1(1457.04,457.87) ; v1(1794.27,341.73) P1.15
  Bottom Layer w4: v1(1457.04,457.87) 1573.18,341.73 v1(1794.27,341.73)
LCD_D11: P1.16 U1.13 | length 479.2
  Top Layer w4: U1.13 v1(1442.04,473.62) ; v1(1806.58,361.42) P1.16
  Bottom Layer w4: v1(1442.04,473.62) 1463.38,473.62 1575.58,361.42 v1(1806.58,361.42)
LCD_D12: P1.17 U1.14 | length 477.6
  Top Layer w4: U1.14 1402.23,489.07 v1(1424.04,489.07) ; v1(1793.9,381.1) P1.17
  Bottom Layer w4: v1(1424.04,489.07) 1468.93,489.07 1576.9,381.1 v1(1793.9,381.1)
LCD_D13: P1.18 U1.15 | length 478
  Top Layer w4: U1.15 v1@1440.09,505.12 ; v1(1806.79,400.79) P1.18
  Bottom Layer w4: v1(1438.04,505.07) 1472.93,505.07 1577.21,400.79 v1(1806.79,400.79)
LCD_D14: P1.19 U1.16 | length 474.3
  Top Layer w4: U1.16 v1(1422.83,520.87) ; v1(1793.47,420.47) P1.19
  Bottom Layer w4: v1(1422.83,520.87) 1480.13,520.87 1580.53,420.47 v1(1793.47,420.47)
LCD_D15: P1.20 U1.17 | length 472.7
  Top Layer w4: U1.17 v1(1437.39,536.61) ; v1(1806.16,440.16) P1.20
  Bottom Layer w4: v1(1437.39,536.61) 1484.39,536.61 1580.84,440.16 v1(1806.16,440.16)
LCD_D18: P1.7 U1.18 | length 636.7
  Top Layer w4: U1.18@1402.29,552 U1.18 v1(1423.64,552.36) ; v1(1706,273) 1783.06,195.94 1815.5,195.94 1827.18,184.25 P1.7
  MidLayer1 w4: v1(1423.64,552.36) 1513.64,552.36 1706,360 v1(1706,273)
LCD_D19: P1.8 U1.19 | length 680.6
  Top Layer w4: v1(1378.04,568.11) U1.19 ; v1(1727,273) 1796.06,203.94 P1.8
  MidLayer1 w4: v1(1378.04,568.11) 1515.89,568.11 1717,367 1717,283 v1(1727,273)
LCD_D20: P1.9 U1.21 | length 716.8
  Top Layer w4: v1(1361.3,599.61) U1.21 ; v1(1749.17,272.54) 1798.09,223.62 P1.9
  MidLayer1 w4: v1(1361.3,599.61) 1502.39,599.61 1727,375 1727,294.72 v1(1749.17,272.54)
LCD_D21: P1.10 U1.23 | length 731.3
  Top Layer w4: U1.23 v1(1375.35,687.7) ; v1(1763,287) 1806.69,243.31 P1.10
  MidLayer1 w4: v1(1375.35,687.7) 1434.3,687.7 1737,385 1737,313 v1(1763,287)
LCD_D22: P1.11 U1.24 | length 762.9
  Top Layer w4: U1.24 v1(1359.61,670.7) ; v1(1763,307) 1807.01,262.99 P1.11
  MidLayer1 w4: v1@1361.35,672.45 v1(1359.61,670.7) 1359.61,700.61 1367,708 1429,708 1748,389 1748,322 v1(1763,307)
LCD_D23: P1.12 U1.25 | length 771.5
  Top Layer w4: U1.25 1344.11,642.18 v1(1344.11,686.7) ; v1(1763,327) 1807.32,282.68 P1.12
  MidLayer1 w4: v1(1344.11,686.7) 1344.11,700.11 1361,717 1434,717 1763,388 v1(1763,327)
LCD_DE: P1.34 U1.27 | length 636.1
  Top Layer w4: U1.27 1312.36,697.68 1334.69,720 1471,720 1532,659 1762,659 1818.75,715.75 P1.34
LCD_HSYNC: P1.32 U1.28 | length 641.8
  Top Layer w4: U1.28 v1(1296.61,670.7) ; v1(1802,671) 1807.38,676.38 P1.32
  MidLayer1 w4: v1(1296.61,670.7) 1296.61,678.61 1347,729 1463,729 1545,647 1778,647 v1(1802,671)
LCD_VSYNC: P1.33 U1.29 | length 812.3
  Top Layer w4: U1.29 v1(1280.87,684.7) ; P1.33 1877.94,696.06 v1(1900,674)
  MidLayer1 w4: v1(1280.87,684.7) 1339.17,743 1477.73,743 1563.73,657 1768.2,657 1796.2,685 1889,685 v1(1900,674)
LEDA: C56.2 D1.K P1.2 U5.5 | length 410.4
  Top Layer w10: P1.2 1879.14,85.83 v1(1891.31,98)
  Bottom Layer w4: U5.5 1911,98
  Bottom Layer w7: 1921,98 1930.07,107.07 1930.07,168.07 1959,197 1959,251.31 C56.2
  Bottom Layer w8: v1(1891.31,98) 1911,98 1921,98
  Bottom Layer w16: C56.2 1931,311 1941.53,321.53 D1.K
LEDK: P1.1 R4.2 U5.3 | length 248.6
  Top Layer w8: R4.2 1784.73,82.27 1800.86,66.14 P1.1 1916.54,66.14 v1(1948.4,98)
  Bottom Layer w8: v1(1948.4,98) U5.3
LINL: U1.86
LRADC: C49.2 P2.13 R29.1 U1.79 | length 238.3
  Top Layer w6: U1.79 1233.62,224.28 1226,216.65 1226,201 1210.27,185.27 R29.1 C49.2 1210.27,99.73 P2.13
MICIN: C46.2 U1.87 | length 102.1
  Top Layer w6: v1(1359.61,193.61) U1.87
  Bottom Layer w6: C46.2 1343.27,186.27 1350.61,193.61 v1(1359.61,193.61)
NetC42_1: C42.1 R25.1 U7.5 U7.6 | length 149.6
  Bottom Layer w6: C42.1 171.63,750.73 203.16,719.21 U7.6 U7.5
  Bottom Layer w10: C42.1 R25.1
NetC44_1: C44.1 P2.14 | length 101.1
  Top Layer w6: C44.1 1312,98 P2.14
NetC45_1: C45.1 P2.15 | length 157.2
  Top Layer w6: C45.1 1346,115 1373,88 1422,88 P2.15
NetC46_1: C46.1 M1.1 R27.2 | length 367.9
  Bottom Layer w8: C46.1 R27.2 1516.91,134 M1.1
NetC47_1: C47.1 P2.16 | length 225.5
  Top Layer w6: C47.1 1380,111 1391,100 1510,100 P2.16
NetC48_1: C48.1 P2.17 | length 288.6
  Top Layer w6: C48.1 1414,116 1420,110 1600,110 P2.17
NetD1_A: D1.A L4.2 U5.1 | length 212
  Bottom Layer w24: U5.1 1873.6,165.32 1882.28,174 L4.2 D1.A@1882.28,345.81
NetDS1_K: DS1.K R6.1 | length 77.9
  Top Layer w6: v1(79,470) DS1.K
  Bottom Layer w6: v1(79,470) 79,513.73 R6.1
NetL1_1: L1.1 U4.11 | length 47.9
  Top Layer w10: L1.1 U4.11@328,389.46
NetL2_1: L2.1 U4.20 | length 68.5
  Top Layer w12: U4.20 v1(420.04,492.96)
  Bottom Layer w20: L2.1 393.43,519.57 v1(420.04,492.96)
NetL3_1: L3.1 U4.6 | length 44.8
  Top Layer w10: U4.6 v1(299.96,497.96)
  Bottom Layer w26: L3.1 v1(299.96,497.96)
NetP1_35: P1.35 R31.2 | length 141
  Top Layer w6: P1.35 1878.43,735.43 1900,757 v1(1900,803)
  Bottom Layer w6: v1@1900.27,803.27 R31.2
NetP1_37: P1.37 U6.2 | length 138.3
  Top Layer w6: U6.2 1782.31,710.31 1809,737 1809,767 1816.8,774.8 P1.37
NetP1_38: P1.38 U6.3 | length 141.2
  Top Layer w6: U6.3 1780,730 1797,747 1797,782 1809.49,794.49 P1.38
NetP1_39: P1.39 U6.4 | length 141.8
  Top Layer w6: U6.4 1778.72,749.68 1785,755.97 1785,791.97 1807.2,814.17 P1.39
NetP1_40: P1.40 U6.5 | length 120.7
  Top Layer w6: U6.5 1805.2,833.86 P1.40
NetR8_2: R8.2 R9.1 U4.14 | length 98.9
  Top Layer w6: U4.14 375.75,365.25 v1(387,354)
  Bottom Layer w6: v1(387,354) R8.2 R9.1
NetR10_2: R10.2 R11.1 U4.3 | length 282.9
  Top Layer w6: v1(296,549) 311,534 356,534 360,530 U4.3
  Bottom Layer w5: R10.2 150.27,480.33 169.23,499.3 169.56,499.3 183.73,513.46 R11.1
  Bottom Layer w6: R11.1 183.73,541.73 191,549 v1(296,549)
NetR12_2: R12.2 R13.1 U4.2 | length 165.9
  Top Layer w6: R13.1 375.2,633.73 ; U4.2 375.2,510.58 375.2,633.73 ; R12.2 375.2,633.73
NetR23_1: R23.1 U6.7 | length 110.3
  Top Layer w6: U6.7 v1(1672,749.68)
  Bottom Layer w6: R23.1 v1@1671.32,749
NetR25_2: R25.2 U7.9 | length 111.9
  Bottom Layer w6: R25.2 248,783 257,792 289,792 305.16,775.84 U7.9
PA0: P2.10 U1.66 | length 258.7
  Top Layer w6: P2.10 960,226.57 U1.66
PA1: P2.9 U1.65 | length 334.7
  Top Layer w6: P2.9 860,174.39 986,300.39 U1.65
PA2: P2.8 U1.64 | length 398.9
  Top Layer w6: P2.8 760,102.14 974,316.14 U1.64
PA3: P2.7 U1.63 | length 474.9
  Top Layer w6: P2.7 942,332 942.11,331.89 U1.63
PE0: P3.6 U1.49 U7.21 | length 1024
  Top Layer w6: P3.6 607,850 690,767 762,767 976.64,552.36 U1.49
  MidLayer1 w6: v1(325,553) 325,632 543,850 P3.6
  Bottom Layer w6: U7.21 325,591.1 v1(325,553)
PE1: P3.7 U1.48 U7.20 | length 948.6
  Top Layer w6: P3.7 721,789 776,789 934,631 934,618.11 984,568.11 U1.48
  MidLayer1 w6: v1(344.53,569.53) 344.53,628.53 485,769 579,769 P3.7
PE2: D4.2 J2.4 P3.8 R24.1 U1.47 | length 1540.5
  Top Layer w6: J2.4 v1(276,204.4) 775.4,204.4 v1(891,320) ; P3.8 961,649 v1(961,613) 990.14,583.86 U1.47
  MidLayer1 w6: v1(891,320) 891,543 v1(961,613)
  Bottom Layer w6: D4.2 260.6,189 v1(276,204.4) R24.1@302.67,204.4
PE3: P3.9 P4.4 R23.2 R33.1 U1.46 | length 1294
  Top Layer w6: P3.9 v1(989,721) 989,606 995.39,599.61 U1.46
  Bottom Layer w6: v1(989,721) 1037,769 1600.27,769 R23.2 ; R23.2@1620.31,749 1620.31,641.68 1652.16,609.84 P4.4
PE4: P3.10 P4.1 U1.45 | length 1210.5
  Top Layer w4: P3.10 1018.07,791.93 v1(1018.07,727) U1.45
  Bottom Layer w6: v1(1018.07,727) 1050.07,759 1574,759 1600,733 1600,621.76 1670.98,550.79 P4.1
PE5: P3.11 U1.44 | length 214.4
  Top Layer w4: U1.44 1044.65,799.65 1060,815 P3.11
PE6: P3.12 R32.1 U1.43 U5.4 | length 1889.6
  Top Layer w4: U1.43 1060.39,750.39 P3.12
  Bottom Layer w6: P3.12 1198,888 1918,888 1978,828 1978,88.23 U5.4
PE7: P3.13 U1.42 | length 317.6
  Top Layer w4: U1.42 1076.14,723.14 1165,812 1222,812 P3.13
PE8: P3.14 U1.41 | length 402.3
  Top Layer w4: U1.41 1091.89,723.89 1170,802 1312,802 P3.14
PE9: P3.15 U1.40 | length 487.6
  Top Layer w4: U1.40 1107.64,725.64 1174,792 1402,792 P3.15
PE10: P3.16 U1.39 | length 572.9
  Top Layer w4: U1.39 1123.39,727.39 1179,783 1493,783 P3.16
PE11: P3.17 P4.6 R21.1 U1.38 U6.10 | length 1123.5
  Top Layer w4: U1.38 1139.13,729.13 1184,774 1502,774 ; U6.10 1540.37,690.63 1502,729 1502,774 ; P3.17 1617,807 1535,807 1502,774
  Bottom Layer w6: P3.17 1687,823 R21.1@1687,650.73 ; R21.1@1688.52,649.21 P4.6
PE12: P3.18 P4.5 R22.1 U1.37 U6.9 | length 1445.2
  Top Layer w6: U1.37 1154.88,729.88 1187,762 1455,762 1544,673 1624,673 1639,688 1639,700.5 1629.19,710.31 U6.9 1534.69,710.31 1520,725 1520,775 1536,791 1701,791 P3.18
  Bottom Layer w6: P3.18 1805.2,804.8 1804.64,804.24 1804.64,748.44 ; R22.1 1804.64,748.44 ; P4.5 1860.53,629.53 1867.32,636.32 1867.32,654.15 1804.64,716.83 1804.64,748.44
RSTN: C20.1 P2.5 R3.1 S2.1 U1.70 | length 909.1
  Top Layer w6: P2.5 460,144.5 S2.1 ; v1(1057,168) 1091.89,202.89 U1.70
  MidLayer1 w6: P2.5 558.27,148.27 1037.27,148.27 v1(1057,168)
  Bottom Layer w14: C20.1 R3.1 v1(1057,168)
SDC0_CLK: J1.5 U1.56 | length 527.1
  Top Layer w6: J1.5 583.48,420.48 605.13,442.13 U1.56
SDC0_CMD: J1.3 R18.2 U1.55 | length 571.7
  Top Layer w6: J1.3 549.91,507.09 599.13,457.87 U1.55
  Bottom Layer w6: R18.2 v1@549.91,507.09
  other v1: 550,507
SDC0_D0: J1.7 R17.2 U1.57 | length 589.6
  Top Layer w6: J1.7 558.86,333.86 651.38,426.38 U1.57
  Bottom Layer w6: R17.2 v1@549.86,333.86
  other v1: 550,334
SDC0_D1: J1.8 R16.2 U1.58 | length 601.2
  Top Layer w6: J1.8 v1(550,290.56) 575.56,290.56 695.63,410.63 U1.58
  Bottom Layer w6: R16.2 v1(550,290.56)
SDC0_D2: J1.1 R20.2 U1.53 | length 594.3
  Top Layer w6: J1.1 550.3,593.7 654.63,489.37 U1.53
  Bottom Layer w6: R20.2 v1@549.7,593.7
  other v1: 550,594
SDC0_D3: J1.2 R19.2 U1.54 | length 583.2
  Top Layer w6: J1.2 v1(550,550.4) 626.78,473.62 U1.54
  Bottom Layer w6: R19.2 v1(550,550.4)
SPI0_CLK: P3.2 U1.59 U3.6 | length 1479.3
  Top Layer w6: P3.2 211,799 325.46,799 431.23,693.23 652.77,693.23 687,659 687,605 666,584 v1(586,584) ; v1(735,347) 782.88,394.88 v1(979.04,394.88) U1.59
  Bottom Layer w6: v1(586,584) 586,389 628,347 v1(735,347) U3.6
SPI0_CS: P3.4 R7.1 U1.60 U3.1 | length 935.9
  Top Layer w6: v1(918.98,379.13) U1.60
  Bottom Layer w6: P3.4 516.69,693.31 R7.1 590.19,643 U3.1 635,552 651,536 807,536 918.98,424.02 v1(918.98,379.13)
SPI0_MISO: P3.5 S1.1 U1.61 U3.2 | length 927.8
  Top Layer w6: P3.5 465.58,844.42 S1.1 ; v1(950,363.07) 978.04,363.07 ; 978.35,363.39 U1.61
  Bottom Layer w6: P3.5 685,625 U3.2 685,576 705,556 821,556 950,427 v1(950,363.07)
SPI0_MOSI: P3.3 U1.62 U3.5 | length 1352.9
  Top Layer w6: P3.3 298,812 330,812 438.77,703.23 666.77,703.23 704,666 704,586 677,559 v1(615,559) ; v1(785,347.64) U1.62
  Bottom Layer w6: v1(615,559) 599,543 599,399.53 632.53,366 766.64,366 v1(785,347.64) U3.5
SVREF: C17.2 C24.1 R5.1 R14.2 U1.33 | length 165.7
  Top Layer w10: v1(1217.87,611.94) U1.33
  Bottom Layer w10: C17.2 R14.2 1211.73,605.8 v1(1217.87,611.94) 1230.06,611.94 1242.27,599.73 R5.1 C24.1
TV_IN0: R30.1 TP1.1 U1.78 | length 409.1
  Top Layer w8: v1@1217.87,231 U1.78
  Top Layer w15: v1(1488.27,196.27) 1496.54,188 TP1.1
  MidLayer1 w8: v1(1218,231) 1218,197 1246,169 1461,169 v1(1488.27,196.27)
  Bottom Layer w8: v1(1488.27,196.27) R30.1
TV_OUT: P2.12 R28.1 U1.72 | length 256.5
  Top Layer w6: v1(1112,222) 1123,222 ; U1.72 1123.39,221.61 1160,185 P2.12
  Bottom Layer w6: R28.1 v1(1112,222)
TV_VRN: C11.1 C13.2 U1.75 | length 94.4
  Top Layer w6: U1.75 1170.88,258.07 v1(1170.88,227.93)
  Bottom Layer w12: C13.2 1165,167.73 1165,222.05 v1(1170.88,227.93)
TV_VRP: C11.2 C12.2 U1.76 | length 96.2
  Top Layer w6: U1.76 1186.38,232.66 v1(1191.11,227.93)
  Bottom Layer w12: v1(1191.11,227.93) 1198,221.04 C12.2
U_N: J3.2 U7.4 | length 102
  Top Layer w4: v1(185.42,695.58) J3.2
  Bottom Layer w4: v1(185.42,695.58) 201.16,679.84 U7.4
U_P: J3.3 U7.3 | length 100.4
  Top Layer w4: v1(185,669.99) J3.3
  Bottom Layer w4: v1(185,669.99) 194.83,660.16 U7.3
USB_DM: D3.2 J2.2 P2.2 U1.68 | length 1241
  Top Layer w4: P2.2 160.25,50.25 160.25,245.25 170.58,255.58 J2.2 v1(275.58,255.58) ; v1(1060.39,223.39) U1.68
  MidLayer1 w4: v1(275.58,255.58) 307.77,223.39 v1(1060.39,223.39)
  Bottom Layer w6: D3.2 260.16,271 v1(275.58,255.58)
USB_DP: D2.1 J2.3 P2.3 U1.69 | length 1293.6
  Top Layer w4: P2.3 211,50 168.25,92.75 168.25,221.25 176.99,229.99 J2.3 v1(275.99,229.99) ; v1(1076.14,210) U1.69
  MidLayer1 w4: v1(275.99,229.99) 289.86,229.99 304.45,215.39 1048.59,215.39 1054.59,209.39 1075.54,209.39 v1(1076.14,210)
  Bottom Layer w6: D2.1 v1(275.99,229.99)
VCC3V3: C14.2 C16.2 C18.2 C28.1 C29.2 C36.2 C37.2 C38.2 C39.2 C41.1 C51.2 C59.1 C60.2 DS1.A J1.4 L1.2 P1.4 P1.31 P2.6 P4.2 R3.2 R7.2 R8.1 R15.1 R16.1 R17.1 R18.1 R19.1 R20.1 R21.2 R22.2 R24.2 R31.1 R33.2 U1.4 U1.5 U1.20 U1.50 U1.67 U2.3 U3.3 U3.7 U3.8 U6.1 | length 2902.1
  Top Layer w4: P1.31 v1(1922.69,656.69)
  Top Layer w6: v1(79,430) DS1.A
  Top Layer w8: v1(991.11,536.61) U1.50 ; U1.4 1422.36,331.89 v1(1430.47,340) 1422.83,347.64 U1.5 ; v1(1670,691) 1670.37,690.63 U6.1 v1(1740.71,678.29)
  Top Layer w14: U1.20 v1(1468,583.86) v1(1598,583.86)
  Top Layer w16: v1(976,186) 1002.27,212.27 1002.27,231.27 1029.07,258.07 U1.67@1044.46,258.07 ; v1(1724.27,144.27) C60.2 1793.73,144.27 1812.8,125.2 P1.4
  Top Layer w20: v1(280.57,288.43) L1.2
  Bottom Layer w4: v1(1933.73,803.27) R31.1
  Bottom Layer w6: C51.2 1666.27,588.96 1685.02,570.2 1714.44,570.2 1714.71,570.47 P4.2
  Bottom Layer w8: R3.2 994,168 v1(976,186) 992,202 C39.2 ; U2.3@1299.11,406.7 1366.11,339.7 ; R21.2 1653.27,687.54 1656.73,691 v1(1670,691) ; v1(1740.71,678.29) R22.2 ; P4.2 1896.47,570.47 1922.69,596.69 v1(1922.69,656.69)
  Bottom Layer w10: R24.2 v1(331.27,171.27) ; R16.1 R17.1 C41.1 R18.1 R19.1 R20.1 R7.2 ; 483.45,463.78 v1(499.96,463.78) ; U3.3 v1(757.81,598.19) ; C38.2 v1@990.72,537 ; 1098.53,401.34 1130.27,369.6 R15.1
  Bottom Layer w14: C14.2 C16.2
  Bottom Layer w16: C18.2 626,246 635,255 U3.8 U3.7 ; v1(991.11,536.61) 991.11,464.13 v1(1053.9,401.34) 1098.53,401.34 1169.19,472 1274,472 1299.11,446.89 U2.3 U2.3@1299.11,406.7 ; 1366.11,339.7 C16.2@1453.57,339.7
  Bottom Layer w20: v1(280.57,288.43) 287.42,295.27 C28.1 C29.2 368.73,295.27 v1(387,277)
  other v1: 661,301.81
VCC_CORE: C1.2 C2.2 C3.2 C10.2 C32.1 C33.2 L2.2 R12.1 U1.22 U1.35 U1.71 | length 1787.7
  Top Layer w7: v1(1186.38,614.7) U1.35
  Top Layer w10: U1.71 v1(1107.64,283)
  Top Layer w12: U1.22 1402.11,615.54 v1(1402.11,634.7)
  Top Layer w20: R12.1 C32.1 428,599 v1(447,580)
  MidLayer1 w10: v1(1107.64,283) 1107.64,535.96 v1(1186.38,614.7) 1219.08,582 1288,582 1340.7,634.7 v1(1402.11,634.7)
  MidLayer1 w20: v1(447,580) 507,640 1161.08,640 v1(1186.38,614.7)
  Bottom Layer w16: C10.2 1093.73,296.91 v1(1107.64,283) ; 1144,614.7 v1(1186.38,614.7) ; C1.2 C3.2 1144.11,587.84 1144.11,603.11 ; v1(1402.11,634.7) 1418.41,651 C2.2
  Bottom Layer w20: L2.2@447,539.43 v1(447,580) C33.2
VCC_DRAM: C15.2 C19.2 C21.2 C24.2 C30.1 C31.2 L3.2 R5.2 R10.1 U1.30 U1.31 U1.32 U1.34 U1.36 | length 1693.5
  Top Layer w7: U1.36 v1(1170.63,663.22) ; U1.34 1202.13,659.72 v1(1218.11,675.7) ; U1.32 1233.62,672.96 1236.36,675.7 ; U1.31 v1(1249.37,675.7) ; U1.30 1265.12,672.96
  Top Layer w12: U1.30 1265.12,621.69 v1(1275.11,611.7)
  Top Layer w16: v1(1218.11,675.7) 1236.36,675.7 v1(1249.37,675.7) 1261.58,675.7 1264.72,672.56
  MidLayer1 w10: v1(206,407) 256,407 335,486 335,511 487.22,663.22 v1(1170.63,663.22)
  Bottom Layer w6: R10.1 183.73,429.27 v1(206,407)
  Bottom Layer w12: C24.2 R5.2 1274.89,587.84 1274.89,611.7 v1(1275.11,611.7) 1302.3,611.7 1309,605 C21.2
  Bottom Layer w14: v1(1170.63,663.22) 1183.11,675.7 v1(1218.11,675.7)
  Bottom Layer w20: v1(206,407) C30.1 C31.2 218.43,451.84 L3.2
VCC_TV: C34.2 C35.2 R15.2 U1.73 | length 120.5
  Top Layer w6: U1.73 v1(1139.13,287)
  Bottom Layer w16: v1@1139.4,286.73 C34.2 ; R15.2@1164,319.73 C34.2 ; C35.2 C34.2
VCCIN: C23.1 C25.1 C26.1 C27.1 C43.2 C55.2 J2.1 J3.1 L4.1 P2.1 U4.7 U4.8 U4.9 U4.10 U4.16 U4.18 U4.19 U5.6 U7.7 U7.8 | length 3738.3
  Top Layer w7: 265.79,450 U4.8 ; 266.04,465.75 U4.7 ; 266.29,418.5 U4.10 ; 266.54,434.25 U4.9
  Top Layer w10: v1(420.04,405.04) U4.16 ; U4.18 449,450 v1(456.5,457.5) 448.25,465.75 U4.19
  Top Layer w16: J2.1 265.79,316.87 265.79,450 265.79,721.17 ; J3.1 265.79,721.17 ; v1(265.79,774.79) 265.79,721.17 ; 266.79,734 C43.2
  MidLayer1 w20: v1(266,380) 344,380 421.5,457.5 v1(456.5,457.5)
  Bottom Layer w16: v1(265.79,774.79) U7.7 U7.8
  Bottom Layer w20: 60,160 148,160 205,103 1557.27,103 1703,248.73 C55.2 C23.1 L4.1@1791.45,248.73 ; 76,380 v1(266,380) ; v1(420.04,405.04) 420.04,464.69 C25.1 449,465 v1(456.5,457.5) ; L4.1 1791.72,157.28 1873.6,75.4 U5.6
  Bottom Layer w30: P2.1 60,160 60,364 76,380
VRA1: C4.1 U1.81 | length 72.9
  Top Layer w6: v1(1265.12,212.71) U1.81
  Bottom Layer w10: C4.1 v1@1265.27,212.56
VRA2: C5.2 C7.2 R1.2 U1.83 | length 121.8
  Top Layer w6: U1.83 v1(1296.61,287.7)
  Bottom Layer w12: v1(1296.61,287.7) 1304.11,280.2 1304.11,267.43 1308.81,262.73 C7.2 R1.2
XI: C9.1 U1.51 X1.3 | length 167.5
  Top Layer w6: U1.51 1041.28,520.87 1060,539.59 v1(1060,540)
  Bottom Layer w6: v1(1060,540) 1089,540 1094.5,545.5 1111.11,562.11 X1.3 1111.11,611.62 C9.1
XO: C8.2 U1.52 X1.1 | length 84.8
  Top Layer w6: U1.52 v1(1046.11,505.12)
  Bottom Layer w6: C8.2 1027,510.12 1032,505.12 v1(1046.11,505.12) X1.1@1066.53,505.12
pads on no net: J3.4 U1.77 U7.1 U7.10 U7.11 U7.12 U7.13 U7.14 U7.15 U7.16 U7.17 U7.18 U7.19 U7.22 U7.23 U7.24

## Polygon pours and split planes (outlines as drawn)
VCC3V3 on MidLayer1 "Signal Layer 1-No Net" (solid, remove dead copper, pour order 0): 0.07,895.48 2001.07,895.48 2001.07,-4.52 2.07,-4.52 1.07,-3.52 1.07,-4.52
GND on Top Layer "Signal Layer 1-No Net" (solid, remove dead copper, pour order 2): 0.85,900.16 2000.85,900.16 2000.85,0.16 0.85,0.16
GND on Bottom Layer "Signal Layer 1-No Net" (solid, remove dead copper, pour order 4): 1.04,898.88 2002.04,898.88 2002.04,-1.12 2.04,-1.12
GND on GND (split plane): 1979.9,20.1 20.1,20.1 20.1,47.68 43.21,70.79 45.71,73.83 47.57,77.31 48.71,81.08 49.1,85 49.1,816 48.71,819.92 47.57,823.69 45.71,827.17 43.21,830.21 20.1,853.32 20.1,879.9 1979.9,879.9

## Keep-outs
Keep-Out Layer:
  the board outline again, w5

## Silkscreen, mask and mechanical layers (free items; w line width, h text height)
Top Overlay:
  drawing of 545 lines, arcs and shapes, not listed
  text "GND" at 11,894 h30 r270
  text "PE10" at 1500.39,891.92 h40 r270
  text "PE12" at 1700,891.82 h40 r270
  text "PE11" at 1599.97,889.47 h40 r270
  text "CLK" at 100,884.26 h40 r270
  text "PE0" at 500.11,881.96 h40 r270
  text "PE2" at 699.72,881.87 h40 r270
  text "PE3" at 800.19,882 h40 r270
  text "PE4" at 899.78,881.94 h40 r270
  text "PE5" at 1000.25,882.09 h40 r270
  text "PE6" at 1100.28,882 h40 r270
  text "PE7" at 1199.86,882 h40 r270
  text "PE8" at 1300.33,882.02 h40 r270
  text "PE9" at 1400.36,882.02 h40 r270
  text "PE1" at 599.69,879.52 h40 r270
  text "MO" at 200.03,877.08 h40 r270
  text "CS" at 300.06,873.4 h40 r270
  text "MI" at 399.64,867.33 h40 r270
  text "BOOT" at 669,732 h60
  text "TINY200" at 1070,730 h80
  text "TTL" at 227,633 h60
  text "PWR" at 133,439 h40
  text "miniHMI" at 685,426 h90
  text "widora.io" at 1510.63,392.63 h60
  text "20190910" at 1557.28,343.63 h40
  text "OTG" at 237.29,194 h60
  text "REST" at 674.91,130 h60
  text "COM" at 1700,90.06 h40 r270
  text "GND" at 300.39,88.43 h40 r270
  text "AGD" at 1000.19,88.41 h40 r270
  text "ADC" at 1200.14,87.65 h40 r270
  text "TVO" at 1100.17,86.13 h40 r270
  text "HPR" at 1499.61,86.63 h40 r270
  text "RST" at 400.36,84.58 h40 r270
  text "HPL" at 1599.58,83.3 h40 r270
  text "PA3" at 600.31,82.19 h40 r270
  text "PA2" at 699.83,82.06 h40 r270
  text "PA0" at 900.22,82.16 h40 r270
  text "3V3" at 500.33,80.84 h40 r270
  text "PA1" at 799.81,79.71 h40 r270
  text "INR" at 1299.67,79.45 h40 r270
  text "INL" at 1399.64,76.12 h40 r270
  text "DM" at 100,75.64 h40 r270
  text "DP" at 199.97,73.26 h40 r270
  text "VIN" at 6,60 h35 r270
Bottom Overlay:
  lines w1: 22.76,263.25 23.76,263.25
  lines w4: 1813,23 1813,160
  text "GND" at 11,837 h30 r270
  text "MI" at 399.64,833.67 h40 r270
  text "CS" at 300.06,827.6 h40 r270
  text "MO" at 200.03,823.92 h40 r270
  text "PE1" at 599.69,821.48 h40 r270
  text "PE0" at 500.11,819.04 h40 r270
  text "PE2" at 699.72,819.13 h40 r270
  text "PE3" at 800.19,819 h40 r270
  text "PE4" at 899.78,819.06 h40 r270
  text "PE5" at 1000.25,818.91 h40 r270
  text "PE6" at 1100.28,819 h40 r270
  text "PE7" at 1199.86,819 h40 r270
  text "PE8" at 1300.33,818.98 h40 r270
  text "PE9" at 1400.36,818.98 h40 r270
  text "CLK" at 100,816.74 h40 r270
  text "PE11" at 1599.97,811.53 h40 r270
  text "PE10" at 1500.39,809.08 h40 r270
  text "PE12" at 1700,809.18 h40 r270
  text "DP" at 199.97,31.74 h40 r270
  text "DM" at 100,29.36 h40 r270
  text "INL" at 1399.64,28.88 h40 r270
  text "PA1" at 799.81,25.29 h40 r270
  text "INR" at 1299.67,25.55 h40 r270
  text "3V3" at 500.33,24.16 h40 r270
  text "PA3" at 600.31,22.81 h40 r270
  text "PA2" at 699.83,22.94 h40 r270
  text "PA0" at 900.22,22.84 h40 r270
  text "HPL" at 1599.58,21.7 h40 r270
  text "RST" at 400.36,20.42 h40 r270
  text "TVO" at 1100.17,18.87 h40 r270
  text "HPR" at 1499.61,18.37 h40 r270
  text "ADC" at 1200.14,17.35 h40 r270
  text "GND" at 300.39,16.57 h40 r270
  text "AGD" at 1000.19,16.59 h40 r270
  text "COM" at 1700,14.94 h40 r270
  text "VIN" at 6,8 h35 r270